# Altium PCB PCB.PcbDoc
Units mm, origin at the board's own origin, x right, y up, seen from the top; angles counter-clockwise.
Board outline 52.5 x 75 mm, 2 copper layers (Top Layer, Bottom Layer); 30 components, 18 nets, 72 pads, 0 vias.
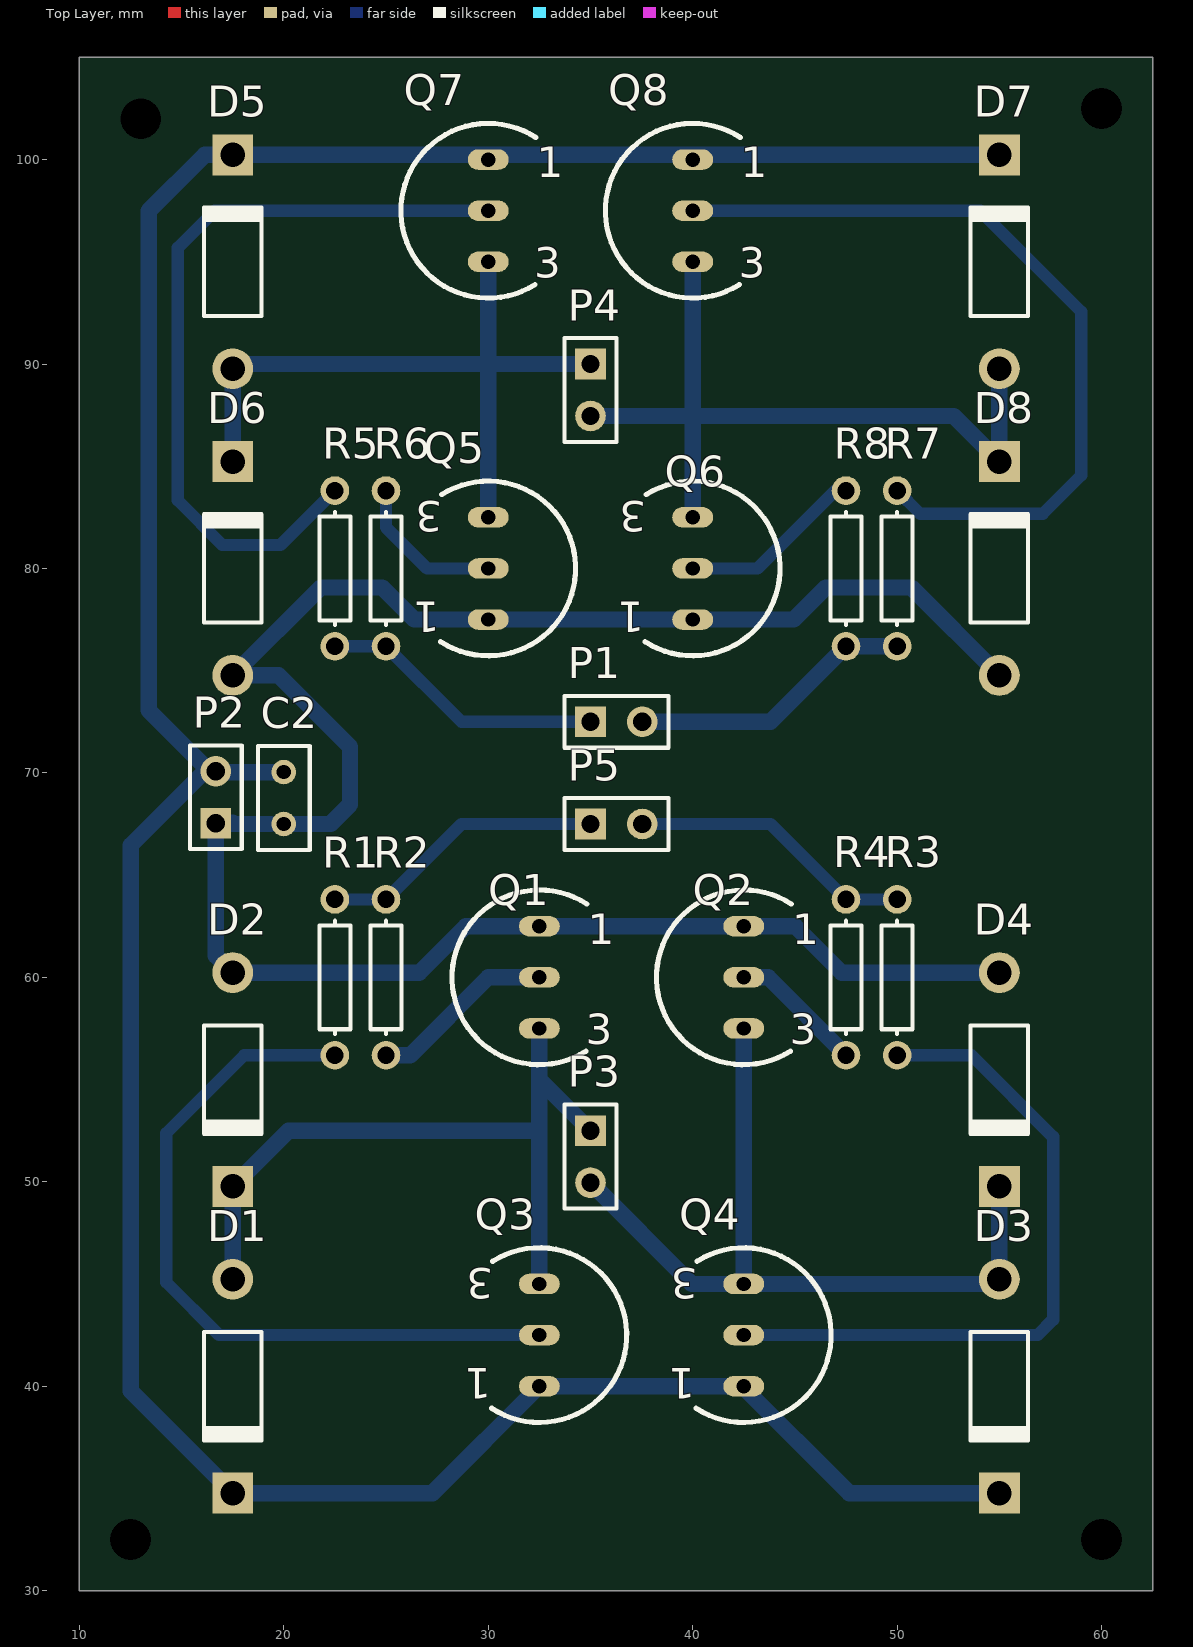
[diagram p0: Top Layer view]
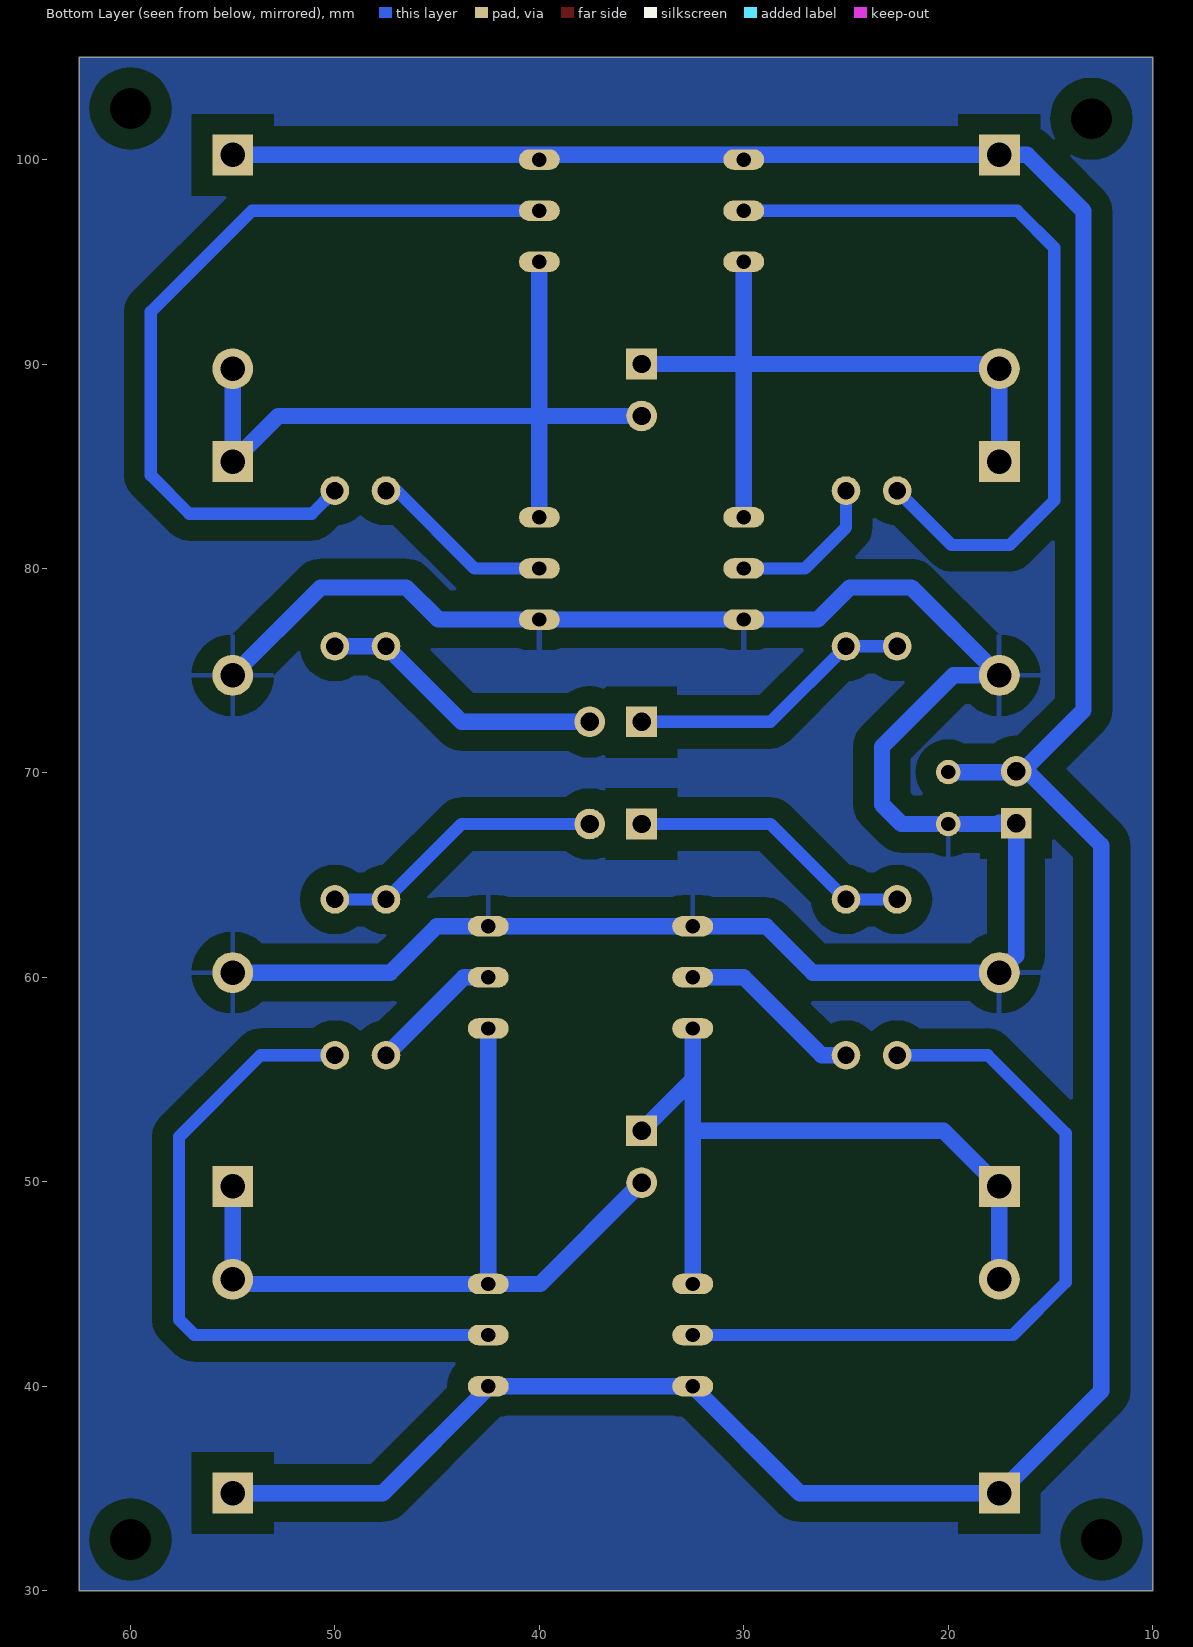
[diagram p1: Bottom Layer view, seen from below]

## Layer stack, top to bottom
Top Layer: signal copper 0.0356
Dielectric: dielectric 0.32, FR-4, Dk 4.8
Bottom Layer: signal copper 0.0356

## Board outline
62.5,105 62.5,30 10,30 10,105

## Design rules (kind name [scope] priority, off if disabled: settings)
Clearance Clearance_1 [IsRegion] p1: gap=1
Clearance [Not HasFootprint('LED')] p2: gap=0.6
PolygonConnect [All] p1: connectstyle=Relief reliefconductorwidth=0.254 reliefentries=4 polygonreliefangle="90 Angle"
RoutingVias [All] p1: holewidth=0.711 width=1.27 viastyle="Through Hole" minholewidth=0.711 minwidth=1.27 maxholewidth=0.711 maxwidth=1.27
SilkscreenOverComponentPads [All] p1: minsilkscreentomaskgap=0.254
SolderMaskExpansion SolderMaskExpansion_1 [HasFootprint('LED')] p1: expansion=0.15
SolderMaskExpansion [Not HasFootprint('LED')] p2: expansion=0.4
Width [All] p1: maxlimit=2 minlimit=0.6 preferedwidth=0.8
27 further rules are at their usual default settings.

## Components (designator, comment, footprint, x,y, rotation, side; value= is the part's Value field where it differs from the comment)
C2 "Cap" RAD-0.1 20,68.77 r90 top
D1 "Diode 1N4004" DO-41 17.5,40 r270 top
D2 "Diode 1N4004" DO-41 17.5,55 r270 top
D3 "Diode 1N4004" DO-41 55,40 r270 top
D4 "Diode 1N4004" DO-41 55,55 r270 top
D5 "Diode 1N4004" DO-41 17.5,95 r90 top
D6 "Diode 1N4004" DO-41 17.5,80 r90 top
D7 "Diode 1N4004" DO-41 55,95 r90 top
D8 "Diode 1N4004" DO-41 55,80 r90 top
P1 "Header 2" HDR1X2 35,72.5 r0 top
P2 "Header 2" HDR1X2 16.673,67.539 r90 top
P3 "Header 2" HDR1X2 35,52.5 r270 top
P4 "Header 2" HDR1X2 35,90 r270 top
P5 "Header 2" HDR1X2 35,67.5 r0 top
Q1 "BC548" TO-92 32.5,60 r0 top
Q2 "BC548" TO-92 42.5,60 r0 top
Q3 "BC558" TO-92 32.5,42.5 r180 top
Q4 "BC558" TO-92 42.5,42.5 r180 top
Q5 "BC548" TO-92 30,80 r180 top
Q6 "BC548" TO-92 40,80 r180 top
Q7 "BC558" TO-92 30,97.5 r0 top
Q8 "BC558" TO-92 40,97.5 r0 top
R1 "Res1" AXIAL-0.3 22.5,60 r270 top
R2 "Res1" AXIAL-0.3 25,60 r90 top
R3 "Res1" AXIAL-0.3 50,60 r270 top
R4 "Res1" AXIAL-0.3 47.5,60 r90 top
R5 "Res1" AXIAL-0.3 22.5,80 r90 top
R6 "Res1" AXIAL-0.3 25,80 r270 top
R7 "Res1" AXIAL-0.3 50,80 r90 top
R8 "Res1" AXIAL-0.3 47.5,80 r270 top

## Footprints (in the part's own frame and the unit in brackets; to place one, negate y for a bottom-side part, rotate by r counter-clockwise, add the part's x,y. Pads: shape width x height; smd on the part's side, far side on the other; paste and mask are expansions set on the pad)
AXIAL-0.3 [mm] "Axial Device, Thru-Hole; 2 Leads; 0.3 in Pin Spacing"
  round 1.4 hole 0.85: 1(-3.81,0) 2(3.81,0)
  silkscreen extent -2.77,-0.76 2.77,0.76
DO-41 [mm] "Diode, Axial; Body 5.2 x 2.7 mm (LxDia. max), Lead Dia. 0.86 mm (max)"
  round 2 hole 1.2: 1(-5.23,0)
  rect 2x2 hole 1.2: 2(5.23,0)
  silkscreen extent -2.65,-1.4 2.75,1.4
HDR1X2 [mm] "Connector; Header; 2 Position"
  rect 1.5x1.5 hole 0.9: 1(0,0)
  round 1.5 hole 0.9: 2(2.54,0)
  silkscreen extent -1.27,-1.27 3.81,1.27
RAD-0.1 [mm] "Radial Cap, Thru-Hole; 2 Leads; 0.1 in Pin Spacing"
  round 1.2 hole 0.7: 1(-1.27,0) 2(1.27,0)
  silkscreen extent -2.54,-1.27 2.54,1.27
TO-92 [mm] "TO, Flat Index; 3 In-Line, Axial Leads; Body Dia. 4.6mm; Leads 0.41 x 0.39 mm (max)"
  oval 2x1 hole 0.7: 1(0,2.5) 2(0,0) 3(0,-2.5)
  silkscreen extent -4.27,-4.27 2.33,4.27

## Part data
C2: "Capacitor"
D1 D2 D3 D4 D5 D6 D7 D8: "1 Amp General Purpose Rectifier"
P1 P2 P3 P4 P5: "Header, 2-Pin"
Q1 Q2 Q5 Q6: "NPN General Purpose Amplifier"
Q3 Q4 Q7 Q8: "PNP Bipolar Transistor"
R1 R2 R3 R4 R5 R6 R7 R8: "Resistor"

## Free pads (board coordinates)
  round 1.524 hole 2: 0(60,32.5) 1(12.5,32.5) 2(60,102.5) 3(13,102)

## Nets (pads, with @x,y where several pads share a name; then routed paths per layer and width w, separated by ;. In a path a pad name is that pad's centre, name@x,y a point inside that pad or via, vN(x,y) a via of type N, cw(c..) or ccw(c..) an arc to the next point about the centre after c; other vN are vias at no path point)
GND: C2.1 D2.1 D4.1 D6.1 D8.1 P2.1 Q1.1 Q2.1 Q5.1 Q6.1 | length 105.8
  Bottom Layer w0.8: 17.461,67.539 P2.1 16.673,61.057 D2.1 26.626,60.23 28.896,62.5 Q1.1 Q2.1 45.018,62.5 47.288,60.23 D4.1 ; 17.5,67.576 17.5,67.5 19.367,67.5 ; C2.1 22.288,67.5 23.241,68.453 23.241,71.272 19.743,74.77 D6.1 21.8,79.07 24.816,79.07 26.386,77.5 Q5.1 Q6.1 44.937,77.5 46.507,79.07 50.7,79.07 D8.1
NetQ1_2: Q1.2 R2.1 | length 9.1
  Bottom Layer w0.8: R2.1 26.193,56.19 30.003,60 Q1.2
NetQ2_2: Q2.2 R4.1 | length 6.6
  Bottom Layer w0.8: Q2.2 43.69,60 R4.1
NetQ3_2: Q3.2 R1.2 | length 36.4
  Bottom Layer w0.6: R1.2 18.065,56.19 14.249,52.375 14.249,45.085 16.834,42.5 Q3.2
NetQ4_2: Q4.2 R3.2 | length 33.7
  Bottom Layer w0.6: Q4.2 56.876,42.5 57.633,43.256 57.633,52.197 53.64,56.19 R3.2
NetQ5_2: Q5.2 R6.1 | length 7.6
  Bottom Layer w0.6: R6.1 25,82.01 27.01,80 Q5.2
NetQ6_2: Q6.2 R8.1 | length 9.1
  Bottom Layer w0.6: Q6.2 43.17,80 46.98,83.81 R8.1
NetQ7_2: Q7.2 R5.2 | length 38
  Bottom Layer w0.6: R5.2 19.843,81.153 16.993,81.153 14.808,83.337 14.808,95.682 16.626,97.5 Q7.2
NetQ8_2: Q8.2 R7.2 | length 39.3
  Bottom Layer w0.6: Q8.2 54.062,97.5 59.004,92.558 59.004,84.557 57.125,82.677 51.133,82.677 R7.2
S1M1: D1.1 D2.2 P3.1 Q1.3 Q3.3 | length 36.7
  Bottom Layer w0.8: D1.1 D2.2 20.23,52.5 32.5,52.5 ; Q3.3 32.5,52.5 ; Q1.3 32.5,55 ; P3.1 32.5,55 ; 32.5,52.5 32.5,55
S1M2: D5.1 D6.2 P4.1 Q5.3 Q7.3 | length 34.6
  Bottom Layer w0.8: D6.2 D5.1 17.73,90 30,90 ; Q5.3 30,90 ; Q7.3 30,90 ; P4.1 30,90
S2M1: D3.1 D4.2 P3.2 Q2.3 Q4.3 | length 39.2
  Bottom Layer w0.8: P3.2 39.96,45 Q4.3 ; Q2.3 Q4.3 ; D3.1 D3.1@55,45.288 ; D4.2 D3.1@55,45.288 ; Q4.3 54.712,45 D3.1@55,45.288
S2M2: D7.1 D8.2 P4.2 Q6.3 Q8.3 | length 38
  Bottom Layer w0.8: P4.2 40,87.46 ; Q6.3 40,87.46 ; Q8.3 40,87.46 ; D7.1 D8.2 52.77,87.46 40,87.46
"SENTIDO 11": P5.2 R3.1 R4.2 | length 14
  Bottom Layer w0.6: P5.2 43.81,67.5 R4.2 R3.1
"SENTIDO 12": P1.2 R7.1 R8.2 | length 14
  Bottom Layer w0.8: P1.2 43.81,72.5 R8.2 R7.1
"SENTIDO 21": P5.1 R1.1 R2.2 | length 14
  Bottom Layer w0.6: R1.1 R2.2 28.69,67.5 P5.1
"SENTIDO 22": P1.1 R5.1 R6.2 | length 14
  Bottom Layer w0.6: R5.1 R6.2 28.69,72.5 P1.1
VCC: C2.2 D1.2 D3.2 D5.2 D7.2 P2.2 Q3.1 Q4.1 Q7.1 Q8.1 | length 156.3
  Bottom Layer w0.8: P2.2 P2.2@16.37,70.079 ; C2.2 16.408,70.04 P2.2@16.37,70.079 ; D3.2 47.653,34.77 42.423,40 Q3.1 27.27,34.77 D1.2 12.508,39.762 12.508,66.457 16.129,70.079 P2.2@16.37,70.079 ; D7.2 D5.2 16.131,100.23 13.386,97.485 13.386,73.063 P2.2@16.37,70.079

## Polygon pours and split planes (outlines as drawn)
GND on Bottom Layer "GND" (solid, remove dead copper, pour order 3): 10,105 62.5,105 62.5,30 10,30

## Text inside footprints (layer, text, board x,y; h text height)
Q1: Top Overlay "3" at 34.761,56.723 h1.5; Top Overlay "1" at 34.862,61.626 h1.5
Q2: Top Overlay "3" at 44.761,56.723 h1.5; Top Overlay "1" at 44.862,61.626 h1.5
Q3: Top Overlay "3" at 30.239,45.777 h1.5 r180; Top Overlay "1" at 30.138,40.874 h1.5 r180
Q4: Top Overlay "3" at 40.239,45.777 h1.5 r180; Top Overlay "1" at 40.138,40.874 h1.5 r180
Q5: Top Overlay "3" at 27.739,83.277 h1.5 r180; Top Overlay "1" at 27.638,78.374 h1.5 r180
Q6: Top Overlay "3" at 37.739,83.277 h1.5 r180; Top Overlay "1" at 37.638,78.374 h1.5 r180
Q7: Top Overlay "3" at 32.261,94.223 h1.5; Top Overlay "1" at 32.362,99.126 h1.5
Q8: Top Overlay "3" at 42.261,94.223 h1.5; Top Overlay "1" at 42.362,99.126 h1.5